# EAGLE board OECOC_controlbord (EAGLE 9.6.2)
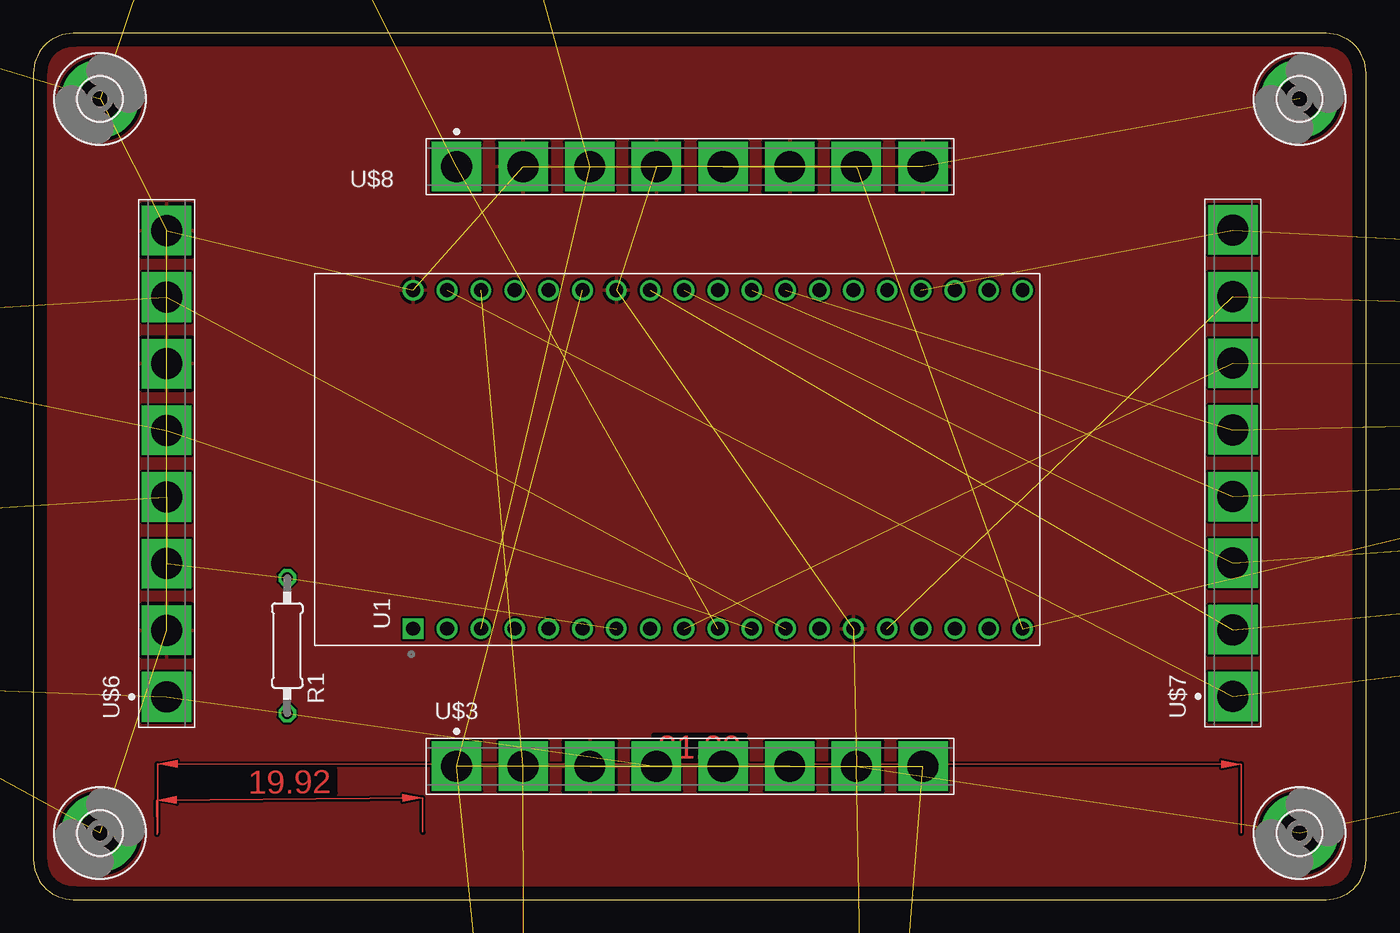
[diagram p0: board, top side]
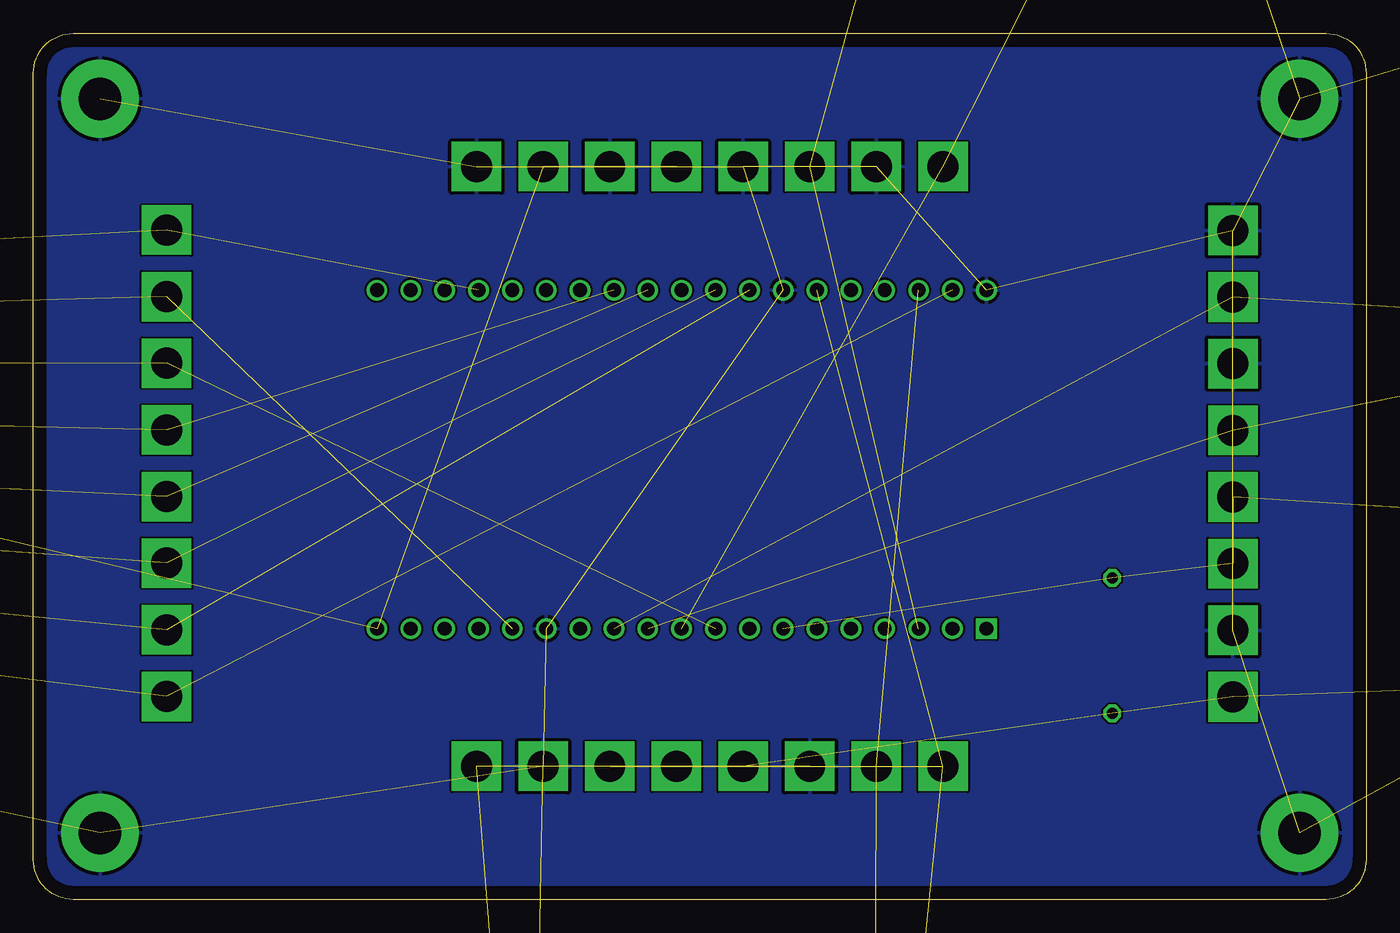
[diagram p1: board, bottom side, seen from below]

Size 100 x 65 mm. Coordinates in mm from the lower left corner, seen from the top.
Outline: 0,62 0,3 arc90 3,0 97,0 arc90 100,3 100,62 arc90 97,65 3,65 arc90 0,62
Copper layers (1*16): Top 0.035mm / dielectric 1.5mm / Bottom 0.035mm
Design rules "default": minimum track width 6mil, minimum drill 0.35mm, track to track 6mil, track to pad 6mil, pad to pad 6mil, via to via 6mil, smd to smd 6mil, copper to edge 40mil, drill to drill 6mil, minimum pad ring 10mil, minimum via ring 8mil, stop-mask expansion 4mil, vias tented up to drill 0mil, thermal gap 10mil

## Footprints (pad centres in the part's own frame; a part is rotated, then mirrored left to right if it is on the bottom)
3,2-PAD = drill 3.2 pad 5.842: B3,2 0,0
TO92- = drill 0.813 octagon: 1 -2.54,0; 2 0,0; 3 2.54,0
0207/10 = drill 0.813 octagon: 1 -5.08,0; 2 5.08,0
MK6-10 = drill 0.6 pad 1.016: 1 -12.7,0; 2 12.7,0
B/C11S = drill 1.321 pad 2.54 octagon: 1 -3.759,0; 2 3.759,0
MODULE_ESP32-DEVKITC-32D = drill 1.04 square: 1 -12.7,19.76 | drill 1.04: 2 -12.7,17.22; 3 -12.7,14.68; 4 -12.7,12.14; 5 -12.7,9.6; 6 -12.7,7.06; 7 -12.7,4.52; 8 -12.7,1.98; 9 -12.7,-0.56; 10 -12.7,-3.1; 11 -12.7,-5.64; 12 -12.7,-8.18; 13 -12.7,-10.72; 14 -12.7,-13.26; 15 -12.7,-15.8; 16 -12.7,-18.34; 17 -12.7,-20.88; 18 -12.7,-23.42; 19 -12.7,-25.96; 20 12.7,19.76; 21 12.7,17.22; 22 12.7,14.68; 23 12.7,12.14; 24 12.7,9.6; 25 12.7,7.06; 26 12.7,4.52; 27 12.7,1.98; 28 12.7,-0.56; 29 12.7,-3.1; 30 12.7,-5.64; 31 12.7,-8.18; 32 12.7,-10.72; 33 12.7,-13.26; 34 12.7,-15.8; 35 12.7,-18.34; 36 12.7,-20.88; 37 12.7,-23.42; 38 12.7,-25.96
RELAY-8-SRD = drill 1 square: J1.1 24.13,8.255; J2.1 24.13,57.15 | drill 1: J1.2 24.13,5.715; J1.3 24.13,3.175; J1.4 24.13,0.635; J1.5 24.13,-1.905; J1.6 24.13,-4.445; J1.7 24.13,-6.985; J1.8 24.13,-9.525; J1.9 24.13,-12.065; J1.10 24.13,-14.605; J2.2 24.13,54.61; J2.3 24.13,52.07 | hole 3.2: -25.4,66.294; 25.4,66.294; 25.4,-66.294; -25.4,-66.294
TEMP-HUM-SENSOR-HTU21D = drill 1 square: 1 -5.08,3.81 | drill 1: 2 -5.08,1.27; 3 -5.08,-1.27; 4 -5.08,-3.81 | hole 3: 3.81,2.54
HDRV8W150P500_1X8_2488X140X1204B = drill 2.321 pad 3.714 square: 1 0,0; 2 5,0; 3 10,0; 4 15,0; 5 20,0; 6 25,0; 7 30,0; 8 35,0
CURRENT-SENSOR-ACS712 = drill 1 square: 1 13.97,2.54 | drill 1: 2 13.97,0; 3 13.97,-2.54

## Placement (x,y rotation side)
H1  MOUNT-PAD-ROUND3.2  [3,2-PAD]  95,5 0 top
H2  MOUNT-PAD-ROUND3.2  [3,2-PAD]  5,5 0 top
H3  MOUNT-PAD-ROUND3.2  [3,2-PAD]  5,60.08 0 top
H4  MOUNT-PAD-ROUND3.2  [3,2-PAD]  95,60.08 0 top
IC1  DS2405  [TO92-]  -25.4,27.94 270 top  (outside the outline)
IC2  DS2405  [TO92-]  -25.4,19.05 270 top  (outside the outline)
R1  [0207/10]  19.05,19.05 270 top
S1  REED-SWITCH-MK6-10  [MK6-10]  -29.21,55.88 90 top  (outside the outline)
S2  REED-SWITCH-MK6-10  [MK6-10]  -22.86,55.88 90 bottom  (outside the outline)
SG1  B/C11S  [B/C11S]  13.97,97.79 0 top  (outside the outline)
U1  ESP32-DEVKITC-32D  [MODULE_ESP32-DEVKITC-32D]  48.26,33.02 90 top
U$1  RELAY-8-SRD  [RELAY-8-SRD]  163.83,39.37 0 top  (outside the outline)
U$2  TEMP-HUM-SENSOR-HTU21D  [TEMP-HUM-SENSOR-HTU21D]  38.1,-20.32 270 top  (outside the outline)
U$3  PHOENIXCONTACT_PINSTRIP  [HDRV8W150P500_1X8_2488X140X1204B]  31.75,10 0 top
U$4  CURRENT-SENSOR-ACS712  [CURRENT-SENSOR-ACS712]  29.21,114.3 270 top  (outside the outline)
U$5  TEMP-HUM-SENSOR-HTU21D  [TEMP-HUM-SENSOR-HTU21D]  60.96,-20.32 270 top  (outside the outline)
U$6  PHOENIXCONTACT_PINSTRIP  [HDRV8W150P500_1X8_2488X140X1204B]  10,15.21 90 top
U$7  PHOENIXCONTACT_PINSTRIP  [HDRV8W150P500_1X8_2488X140X1204B]  90,15.24 90 top
U$8  PHOENIXCONTACT_PINSTRIP  [HDRV8W150P500_1X8_2488X140X1204B]  31.75,55 0 top

## Library data of the parts
H1-H4 = holes
IC1 IC2 = maxim; MF: DALLAS SEMICONDUCTOR; MPN: DS2405; OC_FARNELL: 1188025; OC_NEWARK: 06F4645
R1 = rcl; SPICEPREFIX: R
S1 S2 = switch-reed; OC_FARNELL: unknown
SG1 = buzzer; OC_FARNELL: unknown; OC_NEWARK: unknown
U1 = Personal; AVAILABILITY: In Stock; DESCRIPTION: WiFi Development Tools (802.11) ESP32 General Development Kit, ESP32-WROOM-32D on the board; MF: Espressif Systems; MP: ESP32-DEVKITC-32D; PACKAGE: None; PRICE: None; PURCHASE-URL: https://pricing.snapeda.com/search/part/ESP32-DEVKITC-32D/?ref=eda
U$1 U$2 U$4 U$5 = diy-modules
U$3 U$6-U$8 = Personal

## Nets
3V3: U1.1
+3V3: IC1.3 IC2.3 R1.2 U$2.1 U$3.4 U$3.8 U$5.1 U$6.1
+5V: U1.19 U$1.J1.1 U$8.5 U$8.7
BUZZER: SG1.1 U1.10 U$8.1
DS18B20: IC1.2 IC2.2 R1.1 U1.7 U$6.3 U$6.4
GND: H1.B3,2 H2.B3,2 H3.B3,2 H4.B3,2 IC1.1 IC2.1 S1.2 S2.2 SG1.2 U1.14 U1.20 U1.26 U$1.J1.10 U$2.2 U$3.3 U$3.7 U$4.3 U$5.2 U$6.2 U$6.6 U$6.8 U$8.2 U$8.4 U$8.6 U$8.8
GND.2: U$1.J2.3
IN1: U1.21 U$1.J1.9 U$7.1
IN2: U1.27 U$1.J1.8 U$7.2
IN3: U1.28 U$1.J1.7 U$7.3
IN4: U1.30 U$1.J1.6 U$7.4
IN5: U1.31 U$1.J1.5 U$7.5
IN6: U1.9 U$1.J1.4 U$7.6
IN7: U1.15 U$1.J1.3 U$7.7
IN8: U1.35 U$1.J1.2 U$7.8
N$1: U1.3 U$4.2 U$8.3
REED_1: S2.1 U1.12 U$6.7
REED_2: S1.1 U1.11 U$6.5
SCL: U1.22 U$2.3 U$3.2 U$3.6 U$5.3
SDA: U1.25 U$2.4 U$3.1 U$3.5 U$5.4
VCC: U$4.1
VCC.2: U$1.J2.2

## Tracks (layer width: path | path; a pad name or v marks a point on that pad's centre or on a via)
+3V3  (7 unrouted)
+5V  (3 unrouted)
BUZZER  (2 unrouted)
DS18B20  (5 unrouted)
GND  (24 unrouted)
  pour Top: -2.54,67.31 102.87,67.31 102.87,-2.54 -2.54,-2.54
  pour Bottom: -2.54,67.31 102.87,67.31 102.87,-2.54 -2.54,-2.54
IN1  (2 unrouted)
IN2  (2 unrouted)
IN3  (2 unrouted)
IN4  (2 unrouted)
IN5  (2 unrouted)
IN6  (2 unrouted)
IN7  (2 unrouted)
IN8  (2 unrouted)
N$1  (2 unrouted)
REED_1  (2 unrouted)
REED_2  (2 unrouted)
SCL  (4 unrouted)
SDA  (4 unrouted)
(copper drawn outside any net)
  shapes: Top area x2

## Text on the board
tValues: BUZZER | GND | A SENS | GND | 5V | GND | 5V | GND | GND | IN8 | REED_1 | IN7 | GND | IN6 | REED_2 | IN5 | IN4 | TEMP | IN3 | TEMP | IN2 | GND | IN1 | 3V3 | SDA | SCL | GND | 3V3 | SDA | SCL | GND | 3V3